# Altium PCB Version1.PcbDoc (part 1 of 2)
Units mm, origin at the board's own origin, x right, y up, seen from the top; angles counter-clockwise.
Board outline 82.53 x 37.85 mm, 2 copper layers (Top Layer, Bottom Layer); 105 components, 60 nets, 265 pads, 342 vias.
Unrouted connection lines stored in the file: 1.
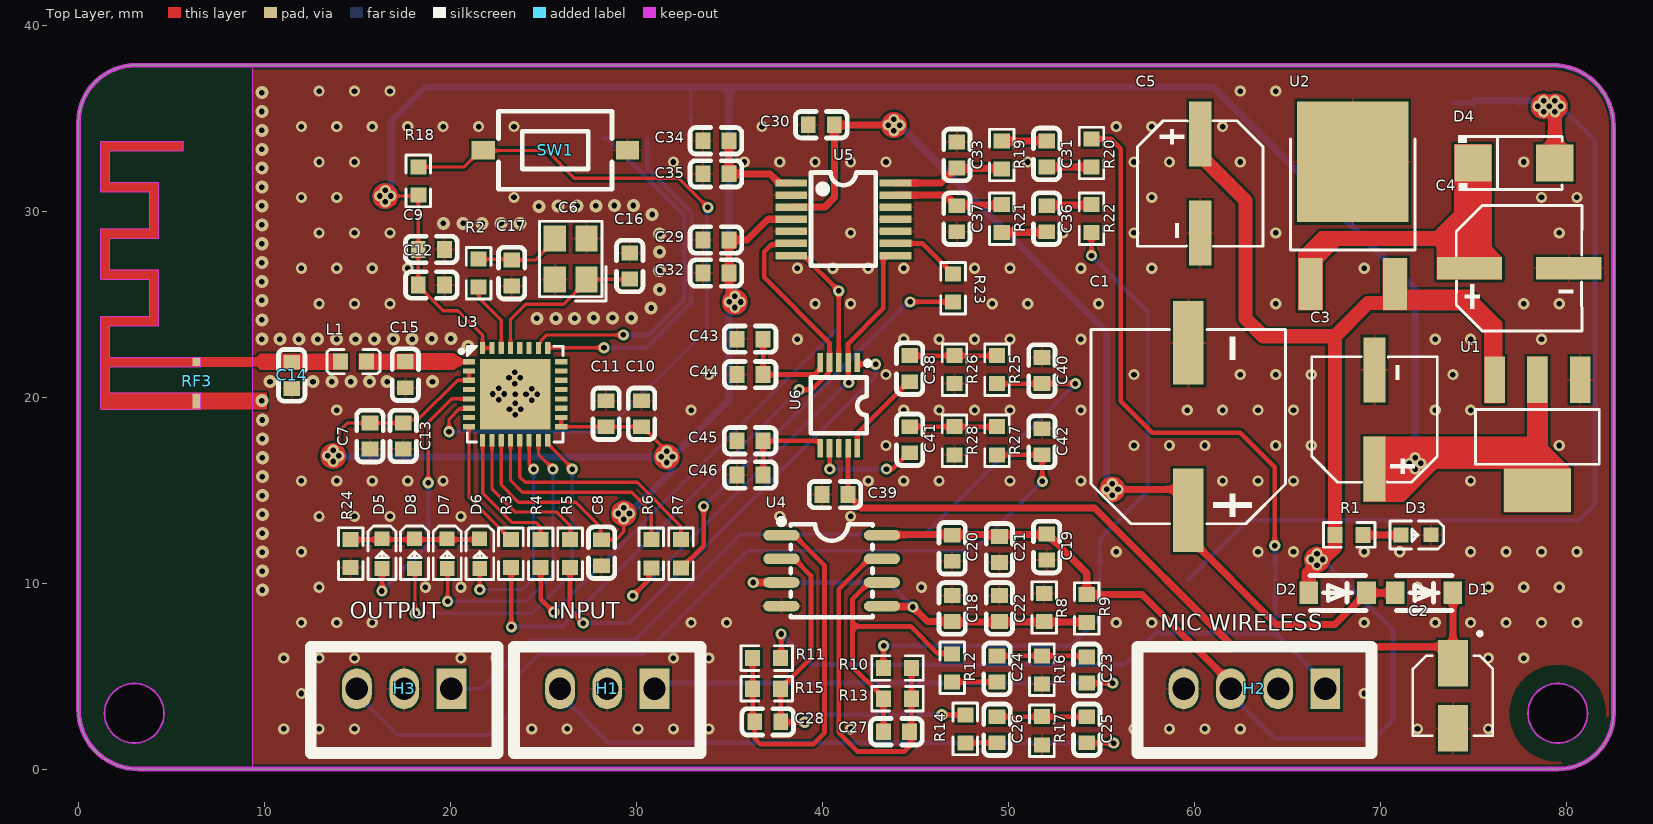
[diagram p0: Top Layer view]
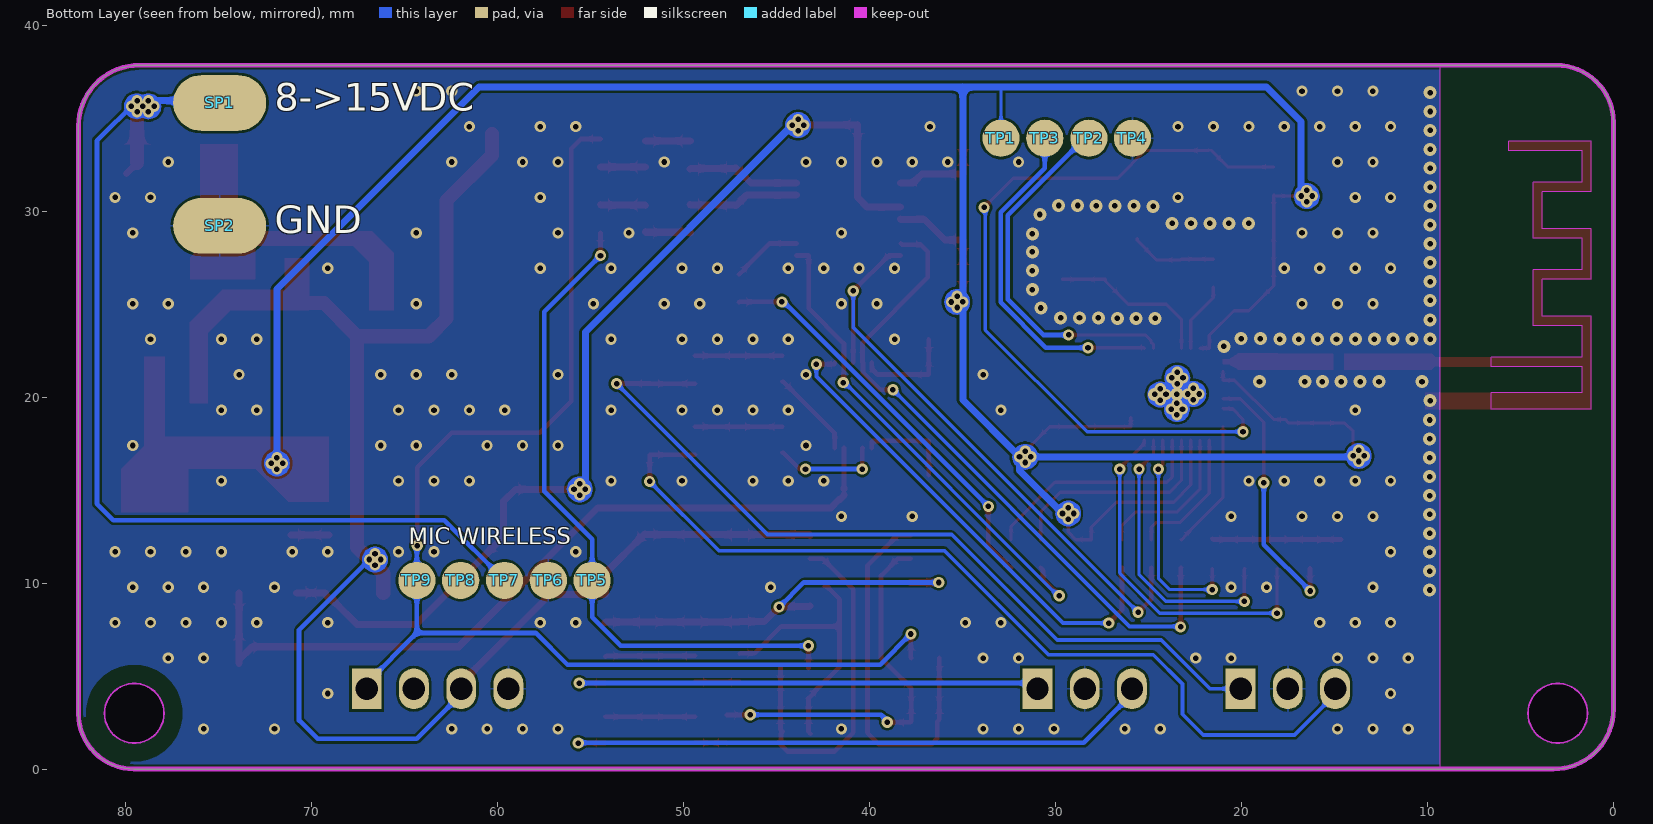
[diagram p1: Bottom Layer view, seen from below]
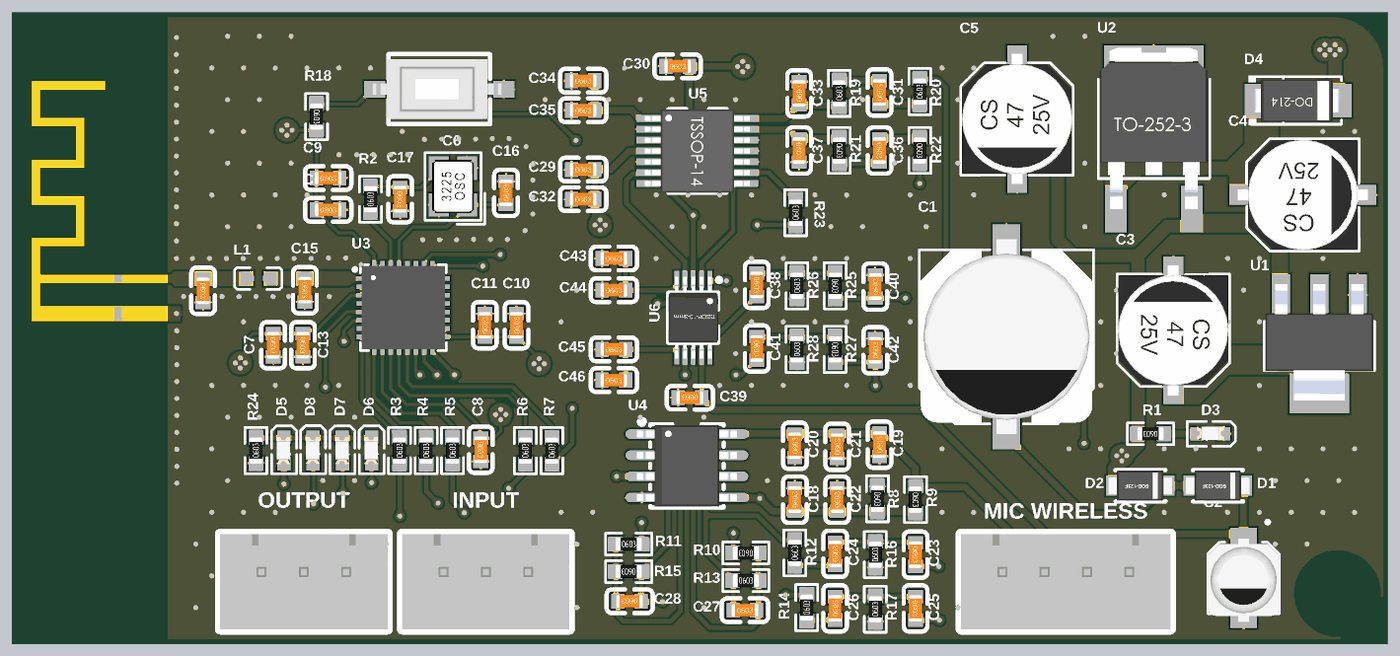
[diagram p2: 3D render of the assembled board from above, using the file's embedded part models]

## Layer stack, top to bottom
Top Solder: solder mask 0.0102, Solder Resist, Dk 3.5
Top Layer: signal copper 0.0356
Dielectric 1: dielectric 0.32, FR-4, Dk 4.8
Bottom Layer: signal copper 0.0356
Bottom Solder: solder mask 0.0102, Solder Resist, Dk 3.5

## Board outline
0,3.213 0,34.765 cw(c3.081,34.765) 3.081,37.846 3,37.846 79.174,37.846 79.262,37.846 cw(c79.262,34.574) 82.534,34.574 82.534,2.983 cw(c79.551,2.983) 79.551,0 3.213,0 cw(c3.213,3.213)
cut-out: 3,1.4 cw(c3,3) 1.4,3 cw(c3,3) 3,4.6 cw(c3,3) 4.6,3 cw(c3,3)
cut-out: 77.934,3 ccw(c79.534,3) 79.534,1.4 ccw(c79.534,3) 81.134,3 ccw(c79.534,3) 79.534,4.6 ccw(c79.534,3)

## Design rules (kind name [scope] priority, off if disabled: settings)
BoardOutlineClearance [All] p1: gap=0 ignorepadtopadclearanceinfootprint=FALSE
Clearance ANT_Clearance [InComponentClass('RF1')] p1: gap=0.127 ignorepadtopadclearanceinfootprint=FALSE except(0.25: Arc-Hole Track-Hole SMDPad-Hole THPad-Hole Via-Hole Fill-Hole Poly-Hole Region-Hole Text-Hole)
Clearance [All] p2: gap=0.127 ignorepadtopadclearanceinfootprint=FALSE except(0.25: Arc-Hole Track-Hole SMDPad-Hole THPad-Hole Via-Hole Fill-Hole Poly-Hole Region-Hole Text-Hole)
ComponentClearance [All] p1: gap=0.127 collisioncheckmode=3 verticalgap=0.127 showdistances=TRUE
DiffPairsRouting [All] p1: maxlimit=0.254 minlimit=0.127 mostfreqgap=0.127 toplayer_minwidth=0.127 toplayer_maxwidth=25.4 toplayer_prefwidth=0.127 bottomlayer_minwidth=0.127 bottomlayer_maxwidth=25.4 bottomlayer_prefwidth=0.127 maxuncoupledlength=12.7
Height [All] p1: minheight=0 maxheight=1816.048 prefheight=12.7
HoleSize [All] p1: absolutevalues=TRUE maxlimit=6.3 minlimit=0.3 maxpercent=80.000 minpercent=20.000
HoleToHoleClearance [All] p1: gap=0.025 allowstackedmicrovias=FALSE
MinimumAnnularRing [All] p1: minimumring=0.076
MinimumSolderMaskSliver [All] p1: minsoldermaskwidth=0
PlaneClearance [All] p1: clearance=0.127
PlaneConnect PlaneConnectPowerPads [InPadClass('PowerPads')] p1: planeconnectstyle=Direct reliefexpansion=0.508 reliefentries=4 reliefconductorwidth=0.254 reliefairgap=0.254
PlaneConnect [All] p2: pad.planeconnectstyle=Relief pad.reliefexpansion=0.3 pad.reliefentries=4 pad.reliefconductorwidth=0.127 pad.reliefairgap=0.127 via.planeconnectstyle=Direct via.reliefexpansion=0.3 via.reliefentries=4 via.reliefconductorwidth=0.127 via.reliefairgap=0.127
PolygonConnect PolygonConnectPowerPads [All vs (InPadClass('PowerPads'))] p1: connectstyle=Direct reliefconductorwidth=0.254 reliefentries=4 polygonreliefangle="90 Angle" airgapwidth=0.254
PolygonConnect [All] p2: thpad.connectstyle=Relief thpad.reliefconductorwidth=0.127 thpad.reliefentries=4 thpad.polygonreliefangle="90 Angle" thpad.airgapwidth=0.127 smdpad.connectstyle=Relief smdpad.reliefconductorwidth=0.127 smdpad.reliefentries=4 smdpad.polygonreliefangle="90 Angle" smdpad.airgapwidth=0.127 via.connectstyle=Direct via.reliefconductorwidth=0.127 via.reliefentries=4 via.polygonreliefangle="90 Angle" via.airgapwidth=0.127
RoutingVias [All] p1: holewidth=0.3 width=0.6 viastyle="Through Hole" minholewidth=0.3 minwidth=0.6 maxholewidth=0.6 maxwidth=6.6
SilkToSilkClearance [All] p1: silktosilkclearance=0
SilkToSolderMaskClearance [IsPad] p1: minsilkscreentomaskgap=0 clearancetoexposedcopper=TRUE
SolderMaskExpansion [All] p1: expansion=0.075 istentingtop=FALSE
Width [All] p1: maxlimit=25.4 minlimit=0.127 preferedwidth=0.127 minimp=50.000000 maximp=50.000000 favimp=50.000000
20 further rules are at their usual default settings.

## Classes and differential pairs
component class "Voltage Source": C1 C2 C3 C4 C5 D1 D2 D3 D4 R1 SP1 SP2 U1 U2
component class Peripheral: C18 C19 C20 C21 C22 C23 C24 C25 C26 C27 C28 C29 C30 C31 C32 C33 C34 C35 C36 C37 C38 C39 C40 C41 C42 C43 C44 C45 C46 D5 D6 D7 D8 H1 H2 H3 R8 R9 R10 R11 R12 R13 R14 R15 R16 R17 R18 R19 R20 R21 R22 R23 R24 R25 R26 R27 R28 SW1 TP5 TP6 TP7 TP8 TP9 U4 U5 U6
component class "Micro Controller": C6 C7 C8 C9 C10 C11 C12 C13 C14 C15 C16 C17 L1 R2 R3 R4 R5 R6 R7 TP1 TP2 TP3 TP4 U3
differential pair D: +D_P -D_N

## Components (designator, comment, footprint, x,y, rotation, side; value= is the part's Value field where it differs from the comment)
C1 "10x10.2" C_10x10.2mm_Aluminum_SMD 59.674,18.415 r90 top
C2 "10uF/16v" C_4.3x5_Aluminum_smd 73.898,3.937 r270 top
C3 "6.3x5.8" C_6.3x5.8mm_Aluminum_SMD 69.682,18.796 r90 top
C4 "6.3x5.8" C_6.3x5.8mm_Aluminum_SMD 77.457,26.924 r0 top
C5 "6.3x5.8" C_6.3x5.8mm_Aluminum_SMD 60.309,31.483 r270 top
C6 "XL2EL89CPI-111YLC-40M" XL2EL89CPI-111YLC-40M 26.465,27.428 r90 top
C7 "1uF" C0603 15.67,17.903 r270 top
C8 "1uF" C0603 28.127,11.633 r270 top
C9 "10uF" C0603 18.972,27.936 r0 top
C10 "10uF" C0603 30.275,19.105 r90 top
C11 "100nF" C0603 28.37,19.105 r90 top
C12 "100nF" C0603 18.972,26.031 r0 top
C13 "100nF" C0603 17.459,17.907 r270 top
C14 "10pF" C0603 11.465,21.172 r270 top
C15 "10pF" C0603 17.575,21.205 r270 top
C16 "10pF" C0603 29.64,27.047 r90 top
C17 "10pF" C0603 23.29,26.666 r270 top
C18 "10uF" C0603 46.974,8.636 r90 top
C19 "100nF" C0603 52.054,11.938 r90 top
C20 "10uF" C0603 46.974,11.873 r90 top
C21 "22uF" C0603 49.514,11.811 r90 top
C22 "100nF" C0603 49.514,8.636 r90 top
C23 "100nF" C0603 54.213,5.334 r270 top
C24 "10uF" C0603 49.387,5.387 r90 top
C25 "100nF" C0603 54.213,2.114 r270 top
C26 "10uF" C0603 49.387,2.114 r90 top
C27 "10nF" C0603 43.98,2.004 r0 top
C28 "10nF" C0603 37.058,2.54 r180 top
C29 "10uF" C0603 34.274,28.448 r0 top
C30 "10uF" C0603 39.938,34.646 r0 top
C31 "10uF" C0603 52.054,33.073 r90 top
C32 "100nF" C0603 34.274,26.67 r0 top
C33 "10nF" C0603 47.228,33.02 r90 top
C34 "100nF" C0603 34.274,33.782 r0 top
C35 "10uF" C0603 34.274,32.004 r0 top
C36 "10uF" C0603 52.054,29.591 r270 top
C37 "10nF" C0603 47.228,29.591 r270 top
C38 "10uF" C0603 44.688,21.528 r270 top
C39 "10uF" C0603 40.675,14.757 r180 top
C40 "33nF" C0603 51.8,21.421 r90 top
C41 "10uF" C0603 44.688,17.706 r270 top
C42 "33nF" C0603 51.8,17.6 r90 top
C43 "100nF" C0603 36.114,23.114 r0 top
C44 "10uF" C0603 36.114,21.209 r0 top
C45 "100nF" C0603 36.114,17.653 r0 top
C46 "10uF" C0603 36.114,15.811 r0 top
D1 "SOD4007" SOD4007 72.348,9.474 r180 top
D2 "SOD4007" SOD4007 67.701,9.474 r180 top
D3 "YELLOW" LED0603 71.911,12.592 r180 top
D4 "SS34" SS34 77.175,32.588 r0 top
D5 "RED" LED0603 16.316,11.582 r270 top
D6 "RED" LED0603 21.574,11.582 r270 top
D7 "RED" LED0603 19.821,11.582 r270 top
D8 "RED" LED0603 18.061,11.586 r270 top
H1 "Header 3P 2.54 Duc Thang" XH2.54M-3 30.972,4.318 r180 top
H2 "Header 4P 2.54 Duc Thang" XH2.54M-4 67.04,4.318 r180 top
H3 "Header 3P 2.54 Duc Thang" XH2.54M-3 20.05,4.318 r180 top
L1 "0603CT-3N0XGRW" 0603CT-3N0XGRW 14.781,21.905 r0 top
R1 "1kΩ" R0603 68.318,12.589 r180 top
R2 "10Ω" R0603 21.512,26.666 r90 top
R3 "10Ω" R0603 23.25,11.582 r90 top
R4 "10Ω" R0603 24.851,11.582 r90 top
R5 "10Ω" R0603 26.432,11.582 r90 top
R6 "10Ω" R0603 30.801,11.577 r90 top
R7 "10Ω" R0603 32.394,11.577 r90 top
R8 "5k1Ω" R0603 51.927,8.689 r270 top
R9 "5k1Ω" R0603 54.213,8.636 r270 top
R10 "1kΩ" R0603 44.033,5.433 r180 top
R11 "1kΩ" R0603 37.005,5.969 r0 top
R12 "1kΩ" R0603 46.974,5.441 r90 top
R13 "5k1Ω" R0603 44.033,3.782 r0 top
R14 "1kΩ" R0603 47.685,2.159 r90 top
R15 "5k1Ω" R0603 37.005,4.318 r180 top
R16 "10k" R0603 51.8,5.334 r90 top
R17 "10k" R0603 51.8,2.061 r90 top
R18 "1kΩ" R0603 18.272,31.623 r270 top
R19 "100Ω" R0603 49.641,33.02 r90 top
R20 "1kΩ" R0603 54.467,33.127 r90 top
R21 "100Ω" R0603 49.641,29.591 r270 top
R22 "1kΩ" R0603 54.467,29.591 r270 top
R23 "10Ω" R0603 47.025,25.857 r90 top
R24 "1kΩ" R0603 14.632,11.586 r90 top
R25 "470Ω" R0603 49.387,21.475 r270 top
R26 "10kΩ" R0603 47.101,21.475 r90 top
R27 "470Ω" R0603 49.387,17.653 r270 top
R28 "10kΩ" R0603 47.101,17.653 r90 top
RF3 "Antenna" 2.4GHZ-50OHMS_v1.1 6.59,19.796 r90 top (schematic designator RF1)
SP1 "SP" SP 74.939,35.814 r90 top
SP2 "SP" SP 74.939,29.21 r90 top
SW1 "GT-TC060A-H025-L1S" GT-TC060A-H025-L1S 25.638,33.274 r0 top
TP1 "TP" TP 32.935,33.919 r180 top
TP2 "TP" TP 28.205,33.919 r180 top
TP3 "TP" TP 30.579,33.919 r180 top
TP4 "TP" TP 25.868,33.919 r180 top
TP5 "TP" TP 54.917,10.146 r0 top
TP6 "TP" TP 57.273,10.146 r0 top
TP7 "TP" TP 59.628,10.146 r0 top
TP8 "TP" TP 61.984,10.146 r0 top
TP9 "TP" TP 64.339,10.146 r0 top
U1 "AMS1117-3.3" AMS1117-3.3 78.445,17.958 r90 top
U2 "MC7805BDTRKG" 7805 68.513,29.362 r90 top
U3 "''" ESP32-C3 23.479,20.155 r0 top
U4 "TL072CDR" TL072CDR 40.497,10.668 r270 top
U5 "PCM1808PWR" PCM1808PWR 41.126,29.561 r270 top
U6 "CS4344-CZZR" CS4344-CZZR 40.878,19.558 r180 top

## Footprints (in the part's own frame and the unit in brackets; to place one, negate y for a bottom-side part, rotate by r counter-clockwise, add the part's x,y. Pads: shape width x height; smd on the part's side, far side on the other; paste and mask are expansions set on the pad)
2.4GHZ-50OHMS_v1.1 [mm]
  rect 0.45x0.45 smd: 1(2.103,0.229)
  rect 0.8x0.45 smd: 2(0,0.229)
  Top Layer region: 13.947,0.963 13.447,0.963 13.447,4.903 11.747,4.903 11.747,2.263 8.747,2.263 8.747,4.903 7.047,4.903 7.047,2.263 4.047,2.263 4.047,4.903 2.347,4.903 2.347,0.003 1.847,0.003 1.847,4.903 0.447,4.903 0.447,0.003 -0.453,0.003 -0.453,5.403 4.547,5.403 4.547,2.763 6.547,2.763 6.547,5.403 9.247,5.403 9.247,2.763 11.247,2.763 11.247,5.403 13.947,5.403
  Keep-Out Layer lines w0.01: -0.453,5.403 4.547,5.403 4.547,2.763 6.547,2.763 6.547,5.403 9.247,5.403 9.247,2.763 11.247,2.763 11.247,5.403 13.947,5.403 13.947,0.963 13.447,0.963 13.447,4.903 11.747,4.903 11.747,2.263 8.747,2.263 8.747,4.903 7.047,4.903 7.047,2.263 4.047,2.263 4.047,4.903 2.347,4.903 2.347,0.003 1.847,0.003 1.847,4.903 0.447,4.903 0.447,0.003 -0.453,0.003 -0.453,5.403
0603CT-3N0XGRW [mm] "1.6A 3nH 39mO Wire-wound chip inductor ±2% 0603 Fixed Inductors RoHS"
  rect 0.8x0.864 smd paste-100 mask+0.051: 1(-0.7,0) 2(0.7,0)
  silkscreen extent -1.42,-0.65 1.42,0.65
7805 [mm]
  rect 2.8x1.3 smd paste+0 mask+0.051: 1(-3.292,2.273) 3(-3.292,-2.273)
  rect 6.5x6 smd paste+0 mask+0.051: 2(3.292,0)
  silkscreen extent -1.46,-3.35 4.51,3.34, body extent -3.33,-3.25 6.4,3.25, height 2.41
AMS1117-3.3 [mm]
  rect 2.5x1.1 smd paste+0 mask+0.051: 1(2.97,-2.3) 2(2.97,0) 3(2.97,2.3)
  rect 2.34x3.6 smd paste+0 mask+0.051: 4(-2.97,0)
  silkscreen extent -1.57,-3.33 1.37,3.33, body extent -3.37,-3.25 3.63,3.25, height 1.8
C0603 [mm]
  rect 0.8x0.9 smd: 1(-0.7,0) 2(0.7,0)
  silkscreen extent -1.39,-0.71 1.39,0.71, body extent -0.8,-0.4 0.8,0.4, height 0.4
C_4.3x5_Aluminum_smd [mm]
  rect 2.5x1.6 smd: 1(-1.75,0) 2(1.75,0)
  silkscreen extent -3.45,-2.15 2.15,2.15, body extent -2.37,-2.15 2.63,2.15, height 5.81
C_6.3x5.8mm_Aluminum_SMD [mm] "16V 10uF ±20% SMD,D6.3xL5.8mm Aluminum - Polymer Capacitors RoHS"
  rect 3.5x1.2 smd paste+0 mask+0.051: 1(-2.67,0) 2(2.67,0)
  silkscreen extent -3.38,-3.38 3.38,3.38, body extent -3.9,-3.3 3.9,3.3, height 5.51
C_10x10.2mm_Aluminum_SMD [mm] "1000uF 16V ±20% 347mA@120Hz SMD,D10xL10.2mm Aluminum Electrolytic Capacitors RoHS"
  rect 4.5x1.65 smd paste+0 mask+0.051: 1(-4.5,0) 2(4.5,0)
  silkscreen extent -5.23,-5.23 5.23,5.23, body extent -5.85,-5.15 5.85,5.15, height 10.52
CS4344-CZZR [mm]
  rect 0.3x1 smd paste+0 mask+0.051: 1(-1,-2.3) 2(-0.5,-2.3) 3(0,-2.3) 4(0.5,-2.3) 5(1,-2.3) 6(1,2.3) 7(0.5,2.3) 8(0,2.3) 9(-0.5,2.3) 10(-1,2.3)
  silkscreen extent -1.68,-2.39 1.5,1.5, body extent -1.5,-2.45 1.5,2.45, height 1.11
ESP32-C3 [mm] "Others 160MHz QFN-32-EP(5x5) RF Transceiver Modules and Modems RoHS"
  rect 0.65x0.28 smd paste-100 mask+0.051: 1(-2.478,1.75) 2(-2.478,1.25) 3(-2.478,0.75) 4(-2.478,0.25) 5(-2.478,-0.25) 6(-2.478,-0.75) 7(-2.478,-1.25) 8(-2.478,-1.75) 17(2.478,-1.75) 18(2.478,-1.25) 19(2.478,-0.75) 20(2.478,-0.25) 21(2.478,0.25) 22(2.478,0.75) 23(2.478,1.25) 24(2.478,1.75)
  rect 0.28x0.65 smd paste-100 mask+0.051: 9(-1.75,-2.478) 10(-1.25,-2.478) 11(-0.75,-2.478) 12(-0.25,-2.478) 13(0.25,-2.478) 14(0.75,-2.478) 15(1.25,-2.478) 16(1.75,-2.478) 25(1.75,2.478) 26(1.25,2.478) 27(0.75,2.478) 28(0.25,2.478) 29(-0.25,2.478) 30(-0.75,2.478) 31(-1.25,2.478) 32(-1.75,2.478)
  rect 3.8x3.8 smd paste-100 mask+0.051: 33(0,0)
  silkscreen extent -3,-2.58 2.58,2.58, body extent -2.5,-2.5 2.5,2.5, height 0.9
GT-TC060A-H025-L1S [mm] "Tactile Switch SPST 160gf 2.5mm SMD (SMT) Tab 6.05mm x 3.5mm Surface Mount"
  rect 1.25x1 smd paste+0 mask+0.051: 1(-3.875,0) 2(3.875,0)
  silkscreen extent -3.05,-2.1 3.05,2.1, body extent -4.01,-1.79 3.76,1.79, height 2.54
LED0603 [mm]
  rect 0.8x0.8 smd paste+0 mask+0.051: 1(-0.799,-0.004) 2(0.799,0.004)
  silkscreen extent -1.49,-0.75 1.39,0.76, body extent -0.8,-0.42 0.8,0.38, height 0.7
PCM1808PWR [mm]
  rect 0.4x1.7 smd paste+0 mask+0.051: 1(-1.95,-2.8) 2(-1.3,-2.8) 3(-0.65,-2.8) 4(0,-2.8) 5(0.65,-2.8) 6(1.3,-2.8) 7(1.95,-2.8) 8(1.95,2.8) 9(1.3,2.8) 10(0.65,2.8) 11(0,2.8) 12(-0.65,2.8) 13(-1.3,2.8) 14(-1.95,2.8)
  silkscreen extent -2.51,-1.74 2.5,1.74, body extent -2.5,-3.15 2.5,3.15, height 1.01
R0603 [mm]
  rect 0.806x0.864 smd paste-100 mask+0.051: 1(-0.753,0) 2(0.753,0)
  silkscreen extent -1.39,-0.66 1.39,0.66, body extent -0.8,-0.4 0.8,0.4, height 0.45
SOD4007 [mm]
  rect 1x1.2 smd paste+0 mask+0.051: 1(-1.55,0) 2(1.55,0)
  silkscreen extent -1.52,-0.93 1.49,0.95, body extent -1.9,-0.9 1.9,0.9, height 1.02
SP [mm]
  oval 3x5 smd far side paste+0 mask+0.051: 1(0,0)
SS34 [mm]
  rect 2x2 smd paste+0 mask+0.051: 1(-2.2,0) 2(2.2,0)
  silkscreen extent -2.98,-1.5 2.6,1.5, body extent -2.65,-1.29 2.49,1.27, height 2.63
TL072CDR [mil]
  oval 22.38x76.78 smd paste+0 mask+2: 1(-75,-106.5) 2(-25,-106.5) 3(25,-106.5) 4(75,-106.5) 5(75,106.5) 6(25,106.5) 7(-25,106.5) 8(-75,106.5)
  silkscreen extent -110,-112 98,87, body extent -96,-118 96,118, height 69
TP [mm]
  round 2 smd far side paste+0 mask+0.051: 1(0,0)
XH2.54M-3 [mm]
  rect 1.6x2.2 hole 1.2: 1(0,0)
  oval 1.6x2.2 hole 1.2: 2(2.54,0) 3(5.08,0)
  silkscreen extent -2.48,-2.26 7.56,3.46, body extent -2.48,-2.26 7.56,3.48, height 6.91
XH2.54M-4 [mm]
  rect 1.6x2.2 hole 1.2: 1(0,0)
  oval 1.6x2.2 hole 1.2: 2(2.54,0) 3(5.08,0) 4(7.62,0)
  silkscreen extent -2.48,-2.26 10.1,3.46, body extent -2.48,-2.26 10.1,3.48, height 6.91
XL2EL89CPI-111YLC-40M [mm] "CRYSTAL 40MHz 15pF SMD"
  rect 1.4x1.2 smd paste+0 mask+0.051: 1(-1.1,-0.85) 2(1.1,-0.85) 3(1.1,0.85) 4(-1.1,0.85)
  silkscreen extent -2.26,-1.91 2.03,1.68, body extent -1.6,-1.25 1.6,1.25, height 0.68

## Part data
C1: library part C_10x10.2_Aluminum_SMD, "1000uF 16V ±20% 347mA@120Hz SMD,D10xL10.2mm Aluminum Electrolytic Capacitors RoHS", LCSC Part #=C72470, Manufacturer=ROQANG, Mfr. Part #=RVT1C102M1010, Link=https://www.lcsc.com/product-detail/C72470.html
C2: library part C_4.3x5_Aluminum_SMD, "10ÂµF 16V Aluminum Electrolytic Capacitors Radial, Can - SMD 2000 Hrs @ 105Â°C", Package="RADIAL-2 Panasonic", Availability="In Stock", Check_prices=https://www.snapeda.com/parts/EEE-HB1C100R/Panasonic%20Electronic%20Components/view-part/605830/?ref=eda, MF="Panasonic Electronic", MP=EEE-HB1C100R, Price=None, Purchase-URL=https://pricing.snapeda.com/search/part/EEE-HB1C100R/?ref=eda, SnapEDA_Link=https://www.snapeda.com/parts/EEE-HB1C100R/Panasonic%20Electronic%20Components/view-part/605830/?ref=snap
C3 C4 C5: library part C_6.3x5.8_Aluminum_SMD, "16V 10uF ±20% SMD,D6.3xL5.8mm Aluminum - Polymer Capacitors RoHS", LCSC Part #=C5246522, Manufacturer="Honor Elec", Mfr. Part #=HV1C106M0605PZ, Link=https://www.lcsc.com/product-detail/C5246522.html
C6: "Crystal Oscillator 15pF SMD3225-4P Crystals RoHS", LCSC Part #=C5444549, Manufacturer="YXC Crystal Oscillators", Package=SMD3225-4P, Key Attributes="Crystal Oscillator 15pF SMD3225-4P Crystals RoHS", Link=https://www.lcsc.com/product-detail/C5444549.html?s_z=n_oscillator, Mfr. Part #=XL2EL89CPI-111YLC-40M
C7 C8: library part C0603_1uF_±1%, "50V 10pF NP0 ±1% 0402 Multilayer Ceramic Capacitors MLCC - SMD/SMT ROHS", LCSC Part #=C513681, Manufacturer=YAGEO, Mfr. Part #=CC0402FRNPO9BN100, Package=0603, Tolerance=±1%, Voltage Rating=50V, Capacitance=1uF, Link=https://www.lcsc.com/product-detail/C513681.html?s_z=n_capital%2520yageo%252010pF%25200402
C9 C10 C38 C39 C41: library part C0603_10uF_±1%, "50V 10pF NP0 ±1% 0402 Multilayer Ceramic Capacitors MLCC - SMD/SMT ROHS", LCSC Part #=C513681, Manufacturer=YAGEO, Mfr. Part #=CC0402FRNPO9BN100, Package=0603, Tolerance=±1%, Voltage Rating=50V, Capacitance=10uF, Link=https://www.lcsc.com/product-detail/C513681.html?s_z=n_capital%2520yageo%252010pF%25200402
C11 C12 C13: library part C0603_100nF_±1%, "50V 10pF NP0 ±1% 0402 Multilayer Ceramic Capacitors MLCC - SMD/SMT ROHS", LCSC Part #=C513681, Manufacturer=YAGEO, Mfr. Part #=CC0402FRNPO9BN100, Package=0603, Tolerance=±1%, Voltage Rating=50V, Capacitance=100nF, Link=https://www.lcsc.com/product-detail/C513681.html?s_z=n_capital%2520yageo%252010pF%25200402
C14 C15 C16 C17: library part C0603_10pF_±1%, "50V 10pF NP0 ±1% 0402 Multilayer Ceramic Capacitors MLCC - SMD/SMT ROHS", LCSC Part #=C513681, Manufacturer=YAGEO, Mfr. Part #=CC0402FRNPO9BN100, Package=0603, Tolerance=±1%, Voltage Rating=50V, Capacitance=10pF, Link=https://www.lcsc.com/product-detail/C513681.html?s_z=n_capital%2520yageo%252010pF%25200402
C18 C20 C24 C26 C29 C30 C31 C35 C36 C44 C46: library part C0603_10uF_±10%_X7R, "25V 10uF X5R ±20% 0603 Multilayer Ceramic Capacitors MLCC - SMD/SMT ROHS", LCSC Part #=C596327, Manufacturer=YAGEO, Mfr. Part #=CC0603MRX5R8BB106, Package=0603, Temperature Coefficient=X5R, Tolerance=±20%, Capacitance=10uF, Link=https://www.lcsc.com/product-detail/C596327.html?s_z=n_capital%25200603%252010uF%2520yageo
C19 C22 C23 C25 C32 C34 C43 C45: library part C0603_100nF_±10%_X7R, "50V 100nF X7R ±10% 0603 Multilayer Ceramic Capacitors MLCC - SMD/SMT ROHS", LCSC Part #=C14663, Manufacturer=YAGEO, Mfr. Part #=CC0603KRX7R9BB104, Package=0603, Temperature Coefficient=X7R, Tolerance=±10%, Capacitance=100nF, Link=https://www.lcsc.com/product-detail/C14663.html?s_z=n_capital%25200603%2520100nf
C21: library part C0603_22uF_±20%_X5R, "6.3V 22uF X5R ±20% 0603 Multilayer Ceramic Capacitors MLCC - SMD/SMT ROHS", LCSC Part #=C109448, Manufacturer=YAGEO, Mfr. Part #=CC0603MRX5R5BB226, Package=0603, Temperature Coefficient=X5R, Tolerance=±20%, Capacitance=22uF, ComponentLink1Description="New link", Link=https://www.lcsc.com/product-detail/C109448.html?s_z=n_capital%25200603%252022uf%2520yageo
C27 C28 C33 C37: library part C0603_10nF_±1%, "50V 10pF NP0 ±1% 0402 Multilayer Ceramic Capacitors MLCC - SMD/SMT ROHS", LCSC Part #=C513681, Manufacturer=YAGEO, Mfr. Part #=CC0402FRNPO9BN100, Package=0603, Tolerance=±1%, Voltage Rating=50V, Capacitance=10nF, Link=https://www.lcsc.com/product-detail/C513681.html?s_z=n_capital%2520yageo%252010pF%25200402
C40 C42: library part C0603_33nF_±10%, "100mW Thick Film Resistor 75V ±100ppm/℃ ±1% 470Ω 0603 Chip Resistor - Surface Mount ROHS", LCSC Part #=C106856, Manufacturer=YAGEO, Mfr. Part #=CC0603KRX7R9BB333, Package=0603, Temperature Coefficient=X7R, Tolerance=±10%, Voltage Rating=50V, Capacitance=33nF, Link=https://www.lcsc.com/product-detail/C106856.html?s_z=n_capital%2520yageo%25200603%252033nF
D1 D2: "1A Independent 1kV 1.1V@1A SOD-123FL Diodes - General Purpose ROHS", Current - Rectified=1A, LCSC Part #=C18124, Manufacturer="MDD(Microdiode Semiconductor)", Package=SOD-123FL, Voltage - DC Reverse(Vr)=1kV, Link=https://www.lcsc.com/product-detail/C18124.html?s_z=n_SOD4007, Mfr. Part #=SOD4007
D3: library part D0603_YELLOW, "25mcd~40mcd Water Clear -40℃~+85℃ 624nm Red 120° 60mW 0402 LED Indication - Discrete ROHS", LCSC Part #=C965793, Manufacturer=XINGLIGHT, Mfr. Part #=XL-1005UGC, Package=0603, Power(Watts)=60mW, Voltage - Forward(Vf)=3V, Illumination Color=YELLOW, Link=https://www.lcsc.com/product-detail/C136765.html?s_z=n_LED%25200402%2520RED
D4: "40V Independent 3A 550mV@3A SMA(DO-214AC) Schottky Diodes ROHS", Current - Rectified=3A, LCSC Part #=C8678, Manufacturer="MDD(Microdiode Semiconductor)", Package=SMA(DO-214AC), Voltage - DC Reverse(Vr)=40V, Link=https://www.lcsc.com/product-detail/C8678.html?s_z=n_SS34, Mfr. Part #=SS34
D5 D6 D7 D8: library part D0603_RED, "25mcd~40mcd Water Clear -40℃~+85℃ 624nm Red 120° 60mW 0402 LED Indication - Discrete ROHS", LCSC Part #=C965793, Manufacturer=XINGLIGHT, Mfr. Part #=XL-1005UGC, Package=0603, Power(Watts)=60mW, Voltage - Forward(Vf)=3V, Illumination Color=RED, Link=https://www.lcsc.com/product-detail/C136765.html?s_z=n_LED%25200402%2520RED
H1 H2 H3: "Cắm", Chung_Loai=Cắm, Don_Vi=Con
  H1 H3: Ma_Hang=MH001292, Ten_Linh_Kien="Header 3P XH2.54-3P Đực Thẳng"
  H2: Ma_Hang=MH001285, Ten_Linh_Kien="Header 4P XH2.54-4P Đực Thẳng"
L1: library part L_3nH_3.6A_0603, "1.6A 3nH 39mΩ Wire-wound chip inductor ±2% 0603 Fixed Inductors RoHS", LCSC Part #=C41050064, Manufacturer=Coilcraft, Package=0603, Key Attributes="1.6A 3nH 39mΩ Wire-wound chip inductor ±2% 0603 Fixed Inductors RoHS", Link=https://www.lcsc.com/product-detail/C41050064.html?s_z=n_inductor%25203nH%25200603, Mfr. Part #=0603CT-3N0XGRW
R1 R10 R11 R12 R14 R18 R20 R22 R24: library part R0603_1kΩ_±1%, "62.5mW Thick Film Resistor 50V ±1% ±200ppm/℃ 10Ω 0402 Chip Resistor - Surface Mount ROHS", LCSC Part #=C138066, Manufacturer=YAGEO, Mfr. Part #=RC0402FR-0710RL, Package=0603, Tolerance=±1%, Link=https://www.lcsc.com/product-detail/C138066.html?s_z=n_resistor%25200402%252010R, Resistance=1kΩ
R2 R3 R4 R5 R6 R7 R23: library part R0603_10Ω_±1%, "62.5mW Thick Film Resistor 50V ±1% ±200ppm/℃ 10Ω 0402 Chip Resistor - Surface Mount ROHS", LCSC Part #=C138066, Manufacturer=YAGEO, Mfr. Part #=RC0402FR-0710RL, Package=0603, Tolerance=±1%, Link=https://www.lcsc.com/product-detail/C138066.html?s_z=n_resistor%25200402%252010R, Resistance=10Ω
R8 R9 R13 R15: library part R0603_5k1Ω_±1%, "100mW Thick Film Resistor 75V ±100ppm/℃ ±1% 5.1kΩ 0603 Chip Resistor - Surface Mount ROHS", LCSC Part #=C2907044, Manufacturer=FOJAN, Mfr. Part #=FRC0603F5101TS, Package=0603, Tolerance=±1%, Key Attributes="RES 5.1kΩ ±1% 100mW 0603", Link=https://www.lcsc.com/product-detail/C2907044.html?s_z=n_5k1%25200603, Resistance=5k1Ω
R16 R17: library part R0603_1kΩ_±1%, "62.5mW Thick Film Resistor 50V ±1% ±200ppm/℃ 10Ω 0402 Chip Resistor - Surface Mount ROHS", LCSC Part #=C138066, Manufacturer=YAGEO, Mfr. Part #=RC0402FR-0710RL, Package=0603, Resistance=1kΩ, Tolerance=±1%, Link=https://www.lcsc.com/product-detail/C138066.html?s_z=n_resistor%25200402%252010R
R19 R21: library part R0603_100Ω_±1%, "62.5mW Thick Film Resistor 50V ±1% ±200ppm/℃ 10Ω 0402 Chip Resistor - Surface Mount ROHS", LCSC Part #=C138066, Manufacturer=YAGEO, Mfr. Part #=RC0402FR-0710RL, Package=0603, Tolerance=±1%, Link=https://www.lcsc.com/product-detail/C138066.html?s_z=n_resistor%25200402%252010R, Resistance=100Ω
R25 R27: library part R0603_470Ω_±1%_1, "62.5mW Thick Film Resistor 50V ±1% ±200ppm/℃ 10Ω 0402 Chip Resistor - Surface Mount ROHS", LCSC Part #=C114669, Manufacturer=YAGEO, Mfr. Part #=RC0603FR-07470RL, Package=0603, Tolerance=±1%, Key Attributes="RES 470Ω ±1% 100mW 0603", Link=https://www.lcsc.com/product-detail/C114669.html?s_z=n_resistor%2520470%25CE%25A9%25200603%2520yageo, Resistance=470Ω
R26 R28: library part R0603_10kΩ_±1%, "62.5mW Thick Film Resistor 50V ±1% ±200ppm/℃ 10Ω 0402 Chip Resistor - Surface Mount ROHS", LCSC Part #=C138066, Manufacturer=YAGEO, Mfr. Part #=RC0402FR-0710RL, Package=0603, Tolerance=±1%, Link=https://www.lcsc.com/product-detail/C138066.html?s_z=n_resistor%25200402%252010R, Resistance=10kΩ
SW1: "Tactile Switch SPST 160gf 2.5mm SMD (SMT) Tab 6.05mm x 3.5mm Surface Mount", LCSC Part #=C7450623, Manufacturer=G-Switch, Package=SMD,6x3mm, Key Attributes="SWITCH TACTILE SPST 160gf SMD", Link=https://www.lcsc.com/product-detail/C7450623.html?s_z=n_button, Mfr. Part #=GT-TC060A-H025-L1S
U1: "72dB@(120Hz) 1A Fixed 3.3V Positive 16V SOT-223 Voltage Regulators - Linear, Low Drop Out (LDO) Regulators ROHS", LCSC Part #=C6186, Manufacturer="Advanced Monolithic Systems", Output Current=1A, Package=SOT-223, Link=https://www.lcsc.com/product-detail/C6186.html?s_z=n_ams1117-3.3, Mfr. Part #=AMS1117-3.3
U2: library part 7805, "68dB@(120Hz) 1A Fixed 5V Positive 24V TO-252-2(DPAK) Voltage Regulators - Linear, Low Drop Out (LDO) Regulators ROHS", LCSC Part #=C110908, Manufacturer=onsemi, Output Current=1A, Output Voltage=5V, Package=TO-252-2(DPAK), Voltage - Supply=24V, Link=https://www.lcsc.com/product-detail/C110908.html?s_z=n_7805, Mfr. Part #=MC7805BDTRKG
U3: library part ESP32-C3, "Others 160MHz QFN-32-EP(5x5) RF Transceiver Modules and Modems RoHS", LCSC Part #=C2838500, Manufacturer=ESPRESSIF, Package=QFN-32-EP(5x5), Link=https://www.lcsc.com/product-detail/C2838500.html?s_z=n_ESP32%2520C3
U4: "3mV 65pA 3MHz 13V/us 2 SOIC-8 FET Input Amplifiers ROHS", LCSC Part #=C67473, Manufacturer=TI, Package=SOIC-8, Dual Supply=-15V~15V, Gain Bandwidth Product=3MHz, Link=https://www.lcsc.com/product-detail/C67473.html?s_z=n_TL072CDR, Mfr. Part #=TL072CDR, Noise density(eN)=18nV/√Hz@1kHz, Number of Channels=2
U5: "4.5V~5.5V 24 I2S TSSOP-14 ADCs/DACs - Special Purpose ROHS", LCSC Part #=C55513, Manufacturer=TI, Package=TSSOP-14, Voltage - Supply=4.5V~5.5V, Interface=I2S, Key Attributes="Single-ended analog input 24-bit 96kHz stereo A/D converter", Link=https://www.lcsc.com/product-detail/C55513.html?s_z=n_pcm1808, Mfr. Part #=PCM1808PWR, Number of Channels=2
U6: "250ms I2S 3.3V~5V 24 TSSOP-10-3mm Digital to Analog Converters (DAC) ROHS", LCSC Part #=C8952, Manufacturer="Cirrus Logic", Package=TSSOP-10-3mm, Voltage - Supply=3.3V~5V, Interface=I2S, Key Attributes="10-Pin, 24-Bit, 192 kHz Stereo D/A Converter", Link=https://www.lcsc.com/product-detail/C8952.html?s_z=n_cs4344, Mfr. Part #=CS4344-CZZR, Number of Channels=2

## Via types
v1: diameter 0.6, hole 0.3, Top Layer to Bottom Layer, tented both sides, 274 vias
v2: diameter 0.7, hole 0.3, Top Layer to Bottom Layer, tented both sides, 68 vias

## Nets (pads, with @x,y where several pads share a name; then routed paths per layer and width w, separated by ;. In a path a pad name is that pad's centre, name@x,y a point inside that pad or via, vN(x,y) a via of type N, cw(c..) or ccw(c..) an arc to the next point about the centre after c; other vN are vias at no path point)
+3.3V: C3.1 C7.1 C8.1 C9.1 C10.1 C11.1 C12.1 C13.1 C29.2 C32.2 R18.2 TP1.1 U1.2 U1.4 U3.2 U3.3 U3.11 U3.17 U3.18 U3.31 U3.32 U5.4 | length 168.3
  Top Layer w0.178: v1(14.005,16.84) 14.005,18.161 14.447,18.603 C7.1 17.459,18.603 17.655,18.799 18.275,18.799 20.381,20.905 U3.3 U3.2 ; v1(16.799,30.81) 18.213,30.81 R18.2 18.272,27.937 C12.1 18.271,25.981 19.615,24.638 20.406,24.638 21.729,23.315 U3.32 U3.31 ; U3.11 22.729,15.279 23.657,14.351 26.73,14.351 28.077,13.004 28.077,12.333 28.903,12.333 29.321,12.751 v1(29.321,13.437) ; U3.18 U3.17 C11.1 30.325,18.405 31.937,16.792 v1(31.937,16.789)
  Top Layer w0.381: v1(34.985,25.121) 34.98,25.126 34.98,26.664 C32.2 C29.2 35.946,28.448 37.049,29.551 38.316,29.551 U5.4 ; v1@35.588,25.127 v1(35.601,25.114)
  Bottom Layer w0.178: 29.061,36.629 29.11,36.678 ; TP1.1 32.935,36.616 32.996,36.678
  Bottom Layer w0.381: v1(14.005,16.84) 14.056,16.789 v1(31.937,16.789) ; v1(16.799,30.81) 16.799,34.823 18.653,36.678 29.11,36.678 32.996,36.678 34.985,36.678 ; v1(29.321,13.437) 31.937,16.053 v1(31.937,16.789) ; v1(71.866,16.129) v1(71.866,16.739) 71.866,25.806 60.995,36.678 34.985,36.678 ; v1(31.937,16.789) 34.985,19.837 v1(34.985,25.121) 34.985,36.678
  other v1: 29.016,13.741 29.626,13.741 29.321,14.046 71.561,16.434 72.171,16.434 31.632,16.485 13.7,16.535 31.328,16.789 13.395,16.84 31.632,17.094 13.7,17.145 35.29,24.816 35.29,25.425 16.494,30.505 16.189,30.81 16.494,31.115
+3.7: C2.1 C39.1 D1.1 U6.9 | length 42.2
  Top Layer w0.254: C39.1@41.378,15.116 U6.9
  Top Layer w0.381: C39.1 41.375,14.707 41.584,14.498 41.634,14.498 42.086,14.046 54.619,14.046 62.088,6.578 73.187,6.578 C2.1@73.898,5.867 ; C39.1@41.375,15.063 C39.1@41.375,15.113 ; C2.1 C2.1@73.898,5.867 ; D1.1 C2.1@73.898,5.867
+4.3: C1.1 C30.2 D1.2 D2.1 U5.3 | length 54.6
  Top Layer w0.381: U5.3 40.126,30.211 40.638,30.723 C30.2 40.651,34.633 44.142,34.633 v1(44.155,34.62) ; v1(55.28,15.037) 59.039,15.037 59.674,14.402 C1.1 59.674,12.49 64.392,7.772 67.549,7.772 68.841,9.065 68.941,9.065 69.251,9.374 D2.1 D1.2
  Bottom Layer w0.381: v1(44.155,34.62) 55.28,23.495 v1(55.28,15.037)
  other v1: 55.585,14.732 55.889,15.037 55.585,15.342 43.843,34.322 43.539,34.627 43.843,34.931
+5V: C5.1 C19.2 C20.2 C21.2 D2.2 H2.3 R1.2 R9.1 U1.3 U2.3 U4.8 | length 79.1
  Top Layer w0.381: U4.8 43.235,12.606 52.021,12.606 C19.2 52.104,12.638 54.213,10.529 R9.1 57.189,9.389 61.96,4.618 H2.3
  Top Layer w0.762: C5.1 60.309,33.003 62.747,30.565 62.747,24.232 63.704,23.275 67.557,23.275 ; D2.2 66.151,10.532 67.315,11.696 67.344,11.696 67.557,11.909 67.557,23.275 ; U2.3 70.786,25.32 70.517,25.051 69.333,25.051 67.557,23.275
  Bottom Layer w0.254: H2.3 61.96,4.018 64.352,1.626 69.682,1.626 70.672,2.616 70.672,7.484 v1@66.891,11.264
  other v1: 66.591,10.964 66.286,11.269 66.895,11.269 66.591,11.573
+8VDC: D4.2 SP1.1 TP7.1 | length 56.8
  Top Layer w0.381: D4.2@79.384,32.598 D4.2 D4.2@79.943,32.02
  Top Layer w0.762: D4.2@79.384,32.598 v1(79.384,35.941) ; v1(79.384,35.331) v1(79.384,35.941) ; 79.384,35.636 v1(79.384,35.941)
  Bottom Layer w0.254: TP7.1 62.868,13.386 80.654,13.386 81.543,14.275 81.543,33.782 v1(79.384,35.941) ; SP1.1@73.939,35.814 SP1.1
  Bottom Layer w0.381: SP1.1 75.066,35.941 v1(79.384,35.941)
  other v1: 78.775,35.331 78.47,35.636 79.08,35.636 79.689,35.636 78.775,35.941
AOUTL-C2: C42.1 H3.3 R27.2 | length 48.5
  Top Layer w0.254: R27.2 C42.1 51.825,16.874 v1(51.825,15.469)
  Bottom Layer w0.203: H3.3 14.97,4.018 17.159,1.829 22.057,1.829 23.174,2.946 23.174,4.572 24.749,6.147 30.388,6.147 35.976,11.735 48.092,11.735 v1(51.825,15.469)
AOUTR-C2: C40.1 H3.1 R25.2 | length 44.6
  Top Layer w0.254: R25.2 C40.1 51.805,20.726 v1(53.603,20.726)
  Bottom Layer w0.203: H3.1 21.701,4.318 24.317,6.934 29.905,6.934 35.58,12.609 45.486,12.609 v1(53.603,20.726)
BCK: R6.1 U5.8 U6.2 | length 26.6
  Top Layer w0.254: v1(29.804,9.322) 30.67,10.188 30.67,10.693 R6.1 ; v1(41.411,20.777) 41.395,20.794 41.395,21.841 U6.2 41.378,22.877 43.266,24.766 43.266,27.602 43.276,27.611 U5.8
  Bottom Layer w0.203: v1(29.804,9.322) 29.88,9.322 41.335,20.777 v1(41.411,20.777)
BUTTON: R18.1 SW1.1 U3.6 | length 41.8
  Top Layer w0.178: R18.1 20.74,32.376 SW1.1@21.638,33.274 ; v1(19.923,18.138) 19.923,18.821 20.47,19.368 20.964,19.368 U3.6 ; SW1.1@21.771,33.266 21.777,33.26 25.168,33.26 26.657,31.771 32.272,31.771 v1(33.842,30.201)
  Bottom Layer w0.178: v1(19.923,18.138) 28.307,18.138 33.773,23.604 33.773,30.132 v1(33.842,30.201)
D_N: TP3.1 U3.25 | length 18.6
  Top Layer w0.178: U3.25 25.253,22.657 v1(28.254,22.657)
  Bottom Layer w0.254: v1(28.254,22.657) 30.515,22.657 32.953,25.095 32.953,29.927 30.579,32.301 TP3.1
D_P: TP2.1 U3.26 | length 19.7
  Top Layer w0.178: U3.26 24.729,22.818 24.873,22.962 24.873,23.047 25.169,23.343 v1(29.296,23.343)
  Bottom Layer w0.254: TP2.1 28.422,33.919 32.572,29.769 32.572,25.253 30.662,23.343 30.231,23.343 v1(29.296,23.343)
DIN: R5.1 U6.1 | length 26.2
  Top Layer w0.254: R5.1 26.432,8.553 v1(27.137,7.849) ; U6.1 41.878,21.791 41.901,21.768 v1(42.859,21.768)
  Bottom Layer w0.203: v1(27.137,7.849) 29.6,7.849 42.859,21.107 v1(42.859,21.768)
DOUT: R7.1 R23.1 | length 21.8
  Top Layer w0.254: R7.1 32.423,10.824 33.614,12.014 v1(33.614,14.122) ; v1(44.713,25.121) 47.008,25.121 R23.1
  Bottom Layer w0.254: v1(33.614,14.122) 44.546,25.054 44.647,25.054 v1(44.713,25.121)
GND: C1.2 C2.2 C3.2 C4.2 C5.2 C6.2 C6.4 C7.2 C8.2 C9.2 C10.2 C11.2 C12.2 C13.2 C14.2 C15.2 C16.2 C17.2 C18.2 C19.1 C20.1 C21.1 C22.2 C29.1 C30.1 C32.1 C33.2 C34.1 C35.1 C37.2 C39.2 C40.2 C42.2 C43.1 C44.1 C45.1 C46.1 D3.1 H1.2 H2.4 H3.2 R8.1 R16.1 R17.1 R24.1 R26.1 R28.1 SP2.1 SW1.2 TP4.1 TP6.1 U1.1 U2.2 U3.33 U4.4 U5.2 U5.5 U5.10 U5.11 U5.12 U6.8
  other v1: 11.033,2.159 12.938,2.159 14.843,2.159 24.368,2.159 26.273,2.159 30.083,2.159 31.988,2.159 33.893,2.159 41.513,2.159 56.753,2.159 58.658,2.159 60.563,2.159 62.468,2.159 71.993,2.159 75.803,2.159 11.986,4.064 69.136,4.064 11.033,5.969 12.938,5.969 14.843,5.969 20.558,5.969 22.463,5.969 31.988,5.969 33.893,5.969 75.803,5.969 77.708,5.969 11.986,7.874 13.891,7.874 15.796,7.874 32.941,7.874 34.846,7.874 55.801,7.874 57.706,7.874 69.136,7.874 72.946,7.874 74.851,7.874 76.756,7.874 78.661,7.874 80.566,7.874 12.938,9.779 18.653,9.779 20.558,9.779 45.323,9.779 71.993,9.779 75.803,9.779 77.708,9.779 79.613,9.779 11.986,11.684 55.801,11.684 63.421,11.684 65.326,11.684 69.136,11.684 71.041,11.684 74.851,11.684 76.756,11.684 78.661,11.684 80.566,11.684 12.938,13.589 14.843,13.589 16.748,13.589 20.558,13.589 37.703,13.589 41.513,13.589 11.986,15.494 13.891,15.494 15.796,15.494 17.701,15.494 19.606,15.494 42.466,15.494 44.371,15.494 46.276,15.494 50.086,15.494 53.896,15.494 61.516,15.494 63.421,15.494 65.326,15.494 74.851,15.494 43.418,17.399 56.753,17.399 58.658,17.399 60.563,17.399 64.373,17.399 66.278,17.399 79.613,17.399 23.479,19.05 13.891,19.304 32.941,19.304 44.371,19.304 46.276,19.304 48.181,19.304 50.086,19.304 53.896,19.304 59.611,19.304 61.516,19.304 63.421,19.304 65.326,19.304 72.946,19.304 74.851,19.304 23.174,19.355 23.784,19.355 23.479,19.66 24.368,19.837 22.59,19.863 24.063,20.142 22.285,20.168 22.895,20.168 24.368,20.447 22.59,20.472 23.454,20.726 23.149,21.031 23.758,21.031 33.893,21.209 43.418,21.209 56.753,21.209 62.468,21.209 64.373,21.209 66.278,21.209 73.898,21.209 23.454,21.336 38.656,23.114 44.371,23.114 46.276,23.114 48.181,23.114 50.086,23.114 53.896,23.114 72.946,23.114 74.851,23.114 78.661,23.114 12.938,25.019 14.843,25.019 16.748,25.019 39.608,25.019 41.513,25.019 49.133,25.019 51.038,25.019 54.848,25.019 64.373,25.019 77.708,25.019 79.613,25.019 11.986,26.924 13.891,26.924 15.796,26.924 17.701,26.924 38.656,26.924 40.561,26.924 42.466,26.924 44.371,26.924 48.181,26.924 50.086,26.924 53.896,26.924 57.706,26.924 69.136,26.924 12.938,28.829 14.843,28.829 16.748,28.829 41.513,28.829 52.943,28.829 56.753,28.829 64.373,28.829 79.613,28.829 11.986,30.734 13.891,30.734 23.416,30.734 57.706,30.734 78.661,30.734 80.566,30.734 12.938,32.639 14.843,32.639 31.988,32.639 35.798,32.639 37.703,32.639 39.608,32.639 41.513,32.639 43.418,32.639 51.038,32.639 56.753,32.639 58.658,32.639 62.468,32.639 77.708,32.639 11.986,34.544 13.891,34.544 15.796,34.544 17.701,34.544 19.606,34.544 21.511,34.544 23.416,34.544 36.751,34.544 55.801,34.544 57.706,34.544 61.516,34.544 12.938,36.449 14.843,36.449 16.748,36.449 62.468,36.449 64.373,36.449
  other v2: 9.89,9.627 9.89,10.643 9.89,11.659 9.89,12.675 9.89,13.691 9.89,14.707 9.89,15.723 9.89,16.739 9.89,17.755 9.89,18.771 9.865,19.812 24.673,20.142 23.479,20.155 10.296,20.828 12.608,20.828 13.624,20.828 14.64,20.828 15.656,20.828 16.596,20.828 19.034,20.828 20.953,22.731 9.865,23.114 10.83,23.114 11.846,23.114 12.862,23.114 13.878,23.114 14.894,23.114 15.91,23.114 16.926,23.114 17.942,23.114 18.983,23.139 20.025,23.139 9.865,24.155 24.647,24.232 25.663,24.232 26.679,24.232 27.695,24.257 28.711,24.257 29.727,24.257 30.794,24.79 9.865,25.197 31.251,25.781 9.865,26.213 31.251,26.797 9.865,27.229 31.251,27.813 9.865,28.245 31.251,28.778 9.865,29.261 19.618,29.337 20.685,29.337 21.701,29.337 22.717,29.337 23.733,29.337 30.845,29.82 24.749,30.251 9.865,30.277 25.79,30.277 26.806,30.277 27.822,30.277 28.813,30.302 29.829,30.302 9.865,31.293 9.865,32.309 9.865,33.325 9.865,34.341 9.865,35.357 9.865,36.373
IN_MIC_1: C25.2 H1.3 | length 32.6
  Top Layer w0.254: C25.2 54.23,1.397 v1(55.661,1.397)
  Bottom Layer w0.254: H1.3 25.892,4.018 28.488,1.422 v1@55.661,1.422
IN_MIC_2: C23.2 H1.1 | length 26.2
  Top Layer w0.254: C23.2 54.224,4.623 v1(55.61,4.623)
  Bottom Layer w0.254: H1.1 31.277,4.623 v1(55.61,4.623)
LED1: D6.2 U3.14 | length 11.8
  Top Layer w0.178: v1(21.574,9.652) 21.574,10.779 D6.2 ; U3.14 24.229,16.37 v1(24.47,16.129)
  Bottom Layer w0.178: v1(21.574,9.652) 23.86,9.652 24.47,10.262 v1(24.47,16.129)
LED2: D7.2 U3.15 | length 15.6
  Top Layer w0.178: D7.2 19.847,10.761 v1(19.847,9.017) ; U3.15 24.729,16.936 25.511,16.154 v1(25.511,16.129)
  Bottom Layer w0.178: v1(19.847,9.017) 24.087,9.017 25.511,10.441 v1(25.511,16.129)
LED3: D8.2 U3.16 | length 19.5
  Top Layer w0.178: D8.2 18.094,10.758 v1(18.094,8.382) ; U3.16 25.229,17.493 26.552,16.169 v1(26.552,16.129)
  Bottom Layer w0.178: v1(18.094,8.382) 24.393,8.382 26.552,10.541 v1(26.552,16.129)
LED4: D5.2 U3.5 | length 14
  Top Layer w0.178: v1(18.805,15.392) 18.805,18.644 20.067,19.905 U3.5
  Top Layer w0.254: v1(16.316,9.576) 16.32,9.579 D5.2
  Bottom Layer w0.254: v1(16.316,9.576) 18.805,12.065 v1(18.805,15.392)
MCLK: R3.1 U5.6 U6.4 | length 35.5
  Top Layer w0.254: R3.1 23.276,10.804 v1(23.276,7.645) ; U5.6 38.253,28.188 37.24,28.188 36.865,27.813 36.865,26.441 40.378,22.928 U6.4 40.355,21.835 40.355,21.326 39.425,20.396 v1(38.744,20.396)
  Bottom Layer w0.203: v1(23.276,7.645) 23.301,7.671 26.019,7.671 v1(38.744,20.396)
NetC4_1: C4.1 D4.1 U2.1
NetC14_1: C14.1 L1.1 RF3.1 RF3.2
NetC15_1: C15.1 L1.2 U3.1
NetC23_1: C23.1 C24.2 R16.2 | length 4.8
  Top Layer w0.254: C24.2 R16.2 54.16,6.087 C23.1
NetC24_1: C24.1 R12.1 | length 2.4
  Top Layer w0.254: R12.1 C24.1
NetC25_1: C25.1 C26.2 R17.2 | length 4.8
  Top Layer w0.254: C26.2 R17.2 C25.1
NetC26_1: C26.1 R14.1 | length 1.7
  Top Layer w0.254: R14.1 47.694,1.414 C26.1
NetC27_1: C27.1 R12.2 R13.1 U4.6 | length 15.9
  Top Layer w0.254: C27.1@43.178,1.903 C27.1 R13.1 ; U4.6 42.511,10.033 41.615,9.136 41.615,7.671 ; R13.1@43.313,3.815 43.275,3.815 43.003,4.087 43.003,4.124 41.615,5.513 41.615,7.671 ; R12.2 46.941,6.227 46.183,6.227 44.739,7.671 41.615,7.671
NetC27_2: C27.2 R10.1 R13.2 U4.7 | length 19.4
  Top Layer w0.254: U4.7 42.511,11.303 40.878,9.67 40.878,1.956 41.894,0.94 44.409,0.94 44.767,1.298 44.767,1.917 C27.2 44.786,2.111 R13.2 R10.1
NetC28_1: C28.1 R14.2 R15.1 U4.2 | length 20.7
  Top Layer w0.254: U4.2 38.483,11.303 39.379,10.406 39.379,5.968 37.758,4.347 R15.1 C28.1 37.783,2.515 v1(39.049,2.515) ; v1(46.415,2.921) 46.424,2.912 R14.2
  Bottom Layer w0.254: v1(39.049,2.515) 39.049,2.591 39.379,2.921 v1(46.415,2.921)
NetC28_2: C28.2 R11.1 R15.2 U4.1 | length 20.5
  Top Layer w0.254: R11.1 R15.2 36.251,2.647 C28.2 36.358,1.65 36.662,1.346 39.506,1.346 40.116,1.956 40.116,10.94 38.483,12.573 U4.1
NetC31_1: C31.1 R20.1 | length 2.4
  Top Layer w0.381: C31.1 R20.1
NetC31_2: C31.2 R19.2 | length 2.4
  Top Layer w0.381: R19.2 C31.2
NetC33_1: C33.1 R19.1 U5.14 | length 6.1
  Top Layer w0.381: U5.14 46.369,31.511 47.178,32.32 C33.1 47.255,32.293 49.614,32.293 R19.1
NetC34_2: C34.2 C35.2 U5.1 | length 5.3
  Top Layer w0.381: C34.2 C35.2 37.183,32.004 37.676,31.511 U5.1
NetC36_1: C36.1 R22.1 | length 2.4
  Top Layer w0.381: C36.1 52.081,30.318 54.44,30.318 R22.1
NetC36_2: C36.2 R21.2 | length 2.4
  Top Layer w0.381: R21.2 49.668,28.864 52.027,28.864 C36.2
NetC37_1: C37.1 R21.1 U5.13 | length 6
  Top Layer w0.381: U5.13 46.608,30.861 47.178,30.291 C37.1 47.255,30.318 49.614,30.318 R21.1
NetC38_1: C38.1 R25.1 R26.2 | length 4.7
  Top Layer w0.254: C38.1 R26.2 R25.1
NetC38_2: C38.2 U6.10 | length 4.8
  Top Layer w0.254: U6.10 41.878,18.068 44.638,20.828 C38.2
NetC41_1: C41.1 R27.1 R28.2 | length 4.7
  Top Layer w0.254: C41.1 R28.2 R27.1
NetC41_2: C41.2 U6.7 | length 5.8
  Top Layer w0.254: U6.7 40.387,17.249 40.387,16.138 v1(40.395,16.129) ; v1(43.443,16.129) 43.761,16.129 44.638,17.006 C41.2
  Bottom Layer w0.254: v1(40.395,16.129) v1(43.443,16.129)
NetC43_2: C43.2 C44.2 U6.5 | length 5.4
  Top Layer w0.254: C43.2 C44.2 39.579,21.209 39.878,21.508 U6.5
NetC45_2: C45.2 C46.2 U6.6 | length 5.2
  Top Layer w0.254: C46.2 C45.2 ; C45.2@36.879,17.653 39.833,17.653 39.878,17.608 U6.6
NetD3_2: D3.2 R1.1 | length 2
  Top Layer w0.381: R1.1 D3.2
NetD5_1: D5.1 D6.1 D7.1 D8.1 R24.2 | length 7
  Top Layer w0.254: R24.2 21.528,12.34 D6.1
NetR2_1: R2.1 U3.30 | length 3.8
  Top Layer w0.178: R2.1 21.526,25.899 21.526,25.347 22.729,24.143 U3.30
NetR3_2: R3.2 U3.8 | length 7
  Top Layer w0.178: U3.8 21.001,14.585 22.907,12.679 22.907,12.65 23.222,12.336 R3.2
NetR4_2: R4.2 U3.9 | length 7.4
  Top Layer w0.178: U3.9 21.729,14.831 23.301,13.259 24.597,13.259 24.851,13.005 R4.2
NetR5_2: R5.2 U3.10 | length 8.4
  Top Layer w0.178: U3.10 22.229,15.068 23.479,13.818 25.714,13.818 26.451,13.081 26.451,12.355 R5.2
NetR6_2: R6.2 U3.12 | length 11.9
  Top Layer w0.178: U3.12 23.229,15.515 23.86,14.884 29.753,14.884 30.801,13.837 R6.2
NetR7_2: R7.2 U3.13 | length 12.5
  Top Layer w0.178: U3.13 23.729,15.701 24.012,15.418 30.033,15.418 32.394,13.056 R7.2
NetR23_2: R23.2 U5.9 | length 3.8
  Top Layer w0.254: U5.9 45.374,28.261 46.72,26.916 46.72,26.887 46.996,26.611 R23.2
OUT_MIC_1: H2.1 R11.2 R20.2 TP9.1 | length 67.4
  Top Layer w0.254: R11.2 37.779,5.99 v1(37.779,7.264) ; R20.2 55.512,33.88 56.042,33.35 56.042,19.787 57.744,18.085 62.468,18.085 64.322,16.231 v1(64.322,12.014)
  Bottom Layer w0.254: v1(37.779,7.264) 39.434,5.61 56.241,5.61 57.95,7.319 64.339,7.319 ; v1(64.322,12.014) 64.322,11.938 64.339,11.921 TP9.1 64.339,7.319 ; H2.1 67.04,4.618 64.339,7.319
OUT_MIC_2: R10.2 R22.2 | length 36.5
  Top Layer w0.254: R10.2 43.28,6.618 v1(43.291,6.629) ; v1(54.467,27.61) R22.2
  Bottom Layer w0.254: v1(43.291,6.629) 53.39,6.629 54.917,8.157 54.917,10.146 54.917,12.354 57.49,14.926 57.49,24.587 v1(54.467,27.61)
V_REF: C18.1 C22.1 R8.2 R9.2 U4.3 U4.5 | length 22
  Top Layer w0.381: v1(36.281,10.033) U4.3 ; U4.5 43.228,8.738 44.84,8.738 45.642,7.936 C18.1 47.001,7.909 49.514,7.909 51.927,7.909 54.186,7.909 R9.2
  Bottom Layer w0.254: v1(36.281,10.033) 43.545,10.033 v1(44.866,8.712)
WS: R4.1 U5.7 U6.3 | length 33.5
  Top Layer w0.254: R4.1 24.851,9.144 v1(25.562,8.433) ; U5.7 38.976,27.611 v1(40.878,25.709) U6.3
  Bottom Layer w0.203: v1(25.562,8.433) 40.878,23.749 v1(40.878,25.709)
XIN: C6.1 C16.1 U3.29 | length 8.9
  Top Layer w0.178: U3.29 23.229,24.185 24.038,24.994 26.08,24.994 27.315,26.228 C6.1 29.621,26.328 C16.1
XOUT: C6.3 C17.1 R2.2 | length 4.7
  Top Layer w0.178: R2.2 23.236,27.419 C17.1 24.553,27.366 25.615,28.428 C6.3
pads on no net: H2.2 TP5.1 TP8.1 U3.4 U3.7 U3.19 U3.20 U3.21 U3.22 U3.23 U3.24 U3.27 U3.28

## Polygon pours and split planes (outlines as drawn)
GND on Top Layer "NONET_L-01_P-001" (solid, pour order 0): 0,3.213 0,34.765 cw(c3.081,34.765) 3.081,37.846 3,37.846 79.174,37.846 79.262,37.846 cw(c79.262,34.574) 82.534,34.574 82.534,2.983 cw(c79.551,2.983) 79.551,0 3.213,0 cw(c3.213,3.213)
GND on Bottom Layer "NONET_L-01_P-001" (solid, pour order 1): 0,3.213 0,34.765 cw(c3.081,34.765) 3.081,37.846 3,37.846 79.174,37.846 79.262,37.846 cw(c79.262,34.574) 82.534,34.574 82.534,2.983 cw(c79.551,2.983) 79.551,0 3.213,0 cw(c3.213,3.213)

## Keep-outs
Keep-Out Layer:
  circle w0.102: c3,3 r1.6
  circle w0.102: c79.534,3 r1.6
  pour cut-out: 9.331,0 3.213,0 cw(c3.213,3.213) 0,3.213 0,34.765 cw(c3.081,34.765) 3.081,37.846 9.331,37.846
  lines w0.254: 3,37.846 79.174,37.846 ; 3.081,37.846 ccw(c3.081,34.765) 0,34.765 0,3.213 ccw(c3.213,3.213) 3.213,0 79.551,0 ccw(c79.551,2.983) 82.534,2.983 82.534,34.574 ccw(c79.262,34.574) 79.262,37.846

## Other copper
Top Layer:
  region net +3.3V: 34.604,25.095 34.604,25.121 cw(c35.29,25.121) 35.29,25.806 cw(c35.29,25.121) 35.976,25.121 35.976,25.095 cw(c35.315,25.095) 35.315,24.435 35.265,24.435 cw(c35.265,25.095)
  region net GND: 23.276,20.193 23.276,20.168 cw(c22.59,20.168) 22.59,19.482 cw(c22.59,20.168) 21.904,20.168 21.904,20.193 cw(c22.565,20.193) 22.565,20.853 22.615,20.853 cw(c22.615,20.193)
  region net GND: 23.479,20.345 23.454,20.345 cw(c23.454,21.031) 22.768,21.031 cw(c23.454,21.031) 23.454,21.717 23.479,21.717 cw(c23.479,21.057) 24.139,21.057 24.139,21.006 cw(c23.479,21.006)
  region net GND: 23.682,20.117 23.682,20.142 cw(c24.368,20.142) 24.368,20.828 cw(c24.368,20.142) 25.054,20.142 25.054,20.117 cw(c24.393,20.117) 24.393,19.456 24.343,19.456 cw(c24.343,20.117)
  region net GND: 23.454,20.041 23.479,20.041 cw(c23.479,19.355) 24.165,19.355 cw(c23.479,19.355) 23.479,18.669 23.454,18.669 cw(c23.454,19.329) 22.793,19.329 22.793,19.38 cw(c23.454,19.38)
  region net +8VDC: 78.089,35.611 78.089,35.636 cw(c78.775,35.636) 78.775,36.322 cw(c78.775,35.636) 79.461,35.636 79.461,35.611 cw(c78.8,35.611) 78.8,34.95 78.749,34.95 cw(c78.749,35.611)
  region net +3.3V: 29.296,14.427 29.321,14.427 cw(c29.321,13.741) 30.007,13.741 cw(c29.321,13.741) 29.321,13.056 29.296,13.056 cw(c29.296,13.716) 28.635,13.716 28.635,13.767 cw(c29.296,13.767)
  region net +3.3V: 15.808,30.785 15.808,30.81 cw(c16.494,30.81) 16.494,31.496 cw(c16.494,30.81) 17.18,30.81 17.18,30.785 cw(c16.519,30.785) 16.519,30.124 16.469,30.124 cw(c16.469,30.785)
  region net +3.3V: 30.947,16.764 30.947,16.789 cw(c31.632,16.789) 31.632,17.475 cw(c31.632,16.789) 32.318,16.789 32.318,16.764 cw(c31.658,16.764) 31.658,16.104 31.607,16.104 cw(c31.607,16.764)
  region net +3.3V: 13.014,16.815 13.014,16.84 cw(c13.7,16.84) 13.7,17.526 cw(c13.7,16.84) 14.386,16.84 14.386,16.815 cw(c13.725,16.815) 13.725,16.154 13.675,16.154 cw(c13.675,16.815)
  region net +4.3: 43.158,34.601 43.158,34.627 cw(c43.843,34.627) 43.843,35.312 cw(c43.843,34.627) 44.529,34.627 44.529,34.601 cw(c43.869,34.601) 43.869,33.941 43.818,33.941 cw(c43.818,34.601)
  region net +4.3: 56.27,15.062 56.27,15.037 cw(c55.585,15.037) 55.585,14.351 cw(c55.585,15.037) 54.899,15.037 54.899,15.062 cw(c55.559,15.062) 55.559,15.723 55.61,15.723 cw(c55.61,15.062)
  region net +5V: 65.905,11.243 65.905,11.269 cw(c66.591,11.269) 66.591,11.954 cw(c66.591,11.269) 67.276,11.269 67.276,11.243 cw(c66.616,11.243) 66.616,10.583 66.565,10.583 cw(c66.565,11.243)
  region net +3.3V: 71.841,17.12 71.866,17.12 cw(c71.866,16.434) 72.552,16.434 cw(c71.866,16.434) 71.866,15.748 71.841,15.748 cw(c71.841,16.408) 71.18,16.408 71.18,16.459 cw(c71.841,16.459)
  region net +8VDC: 79.41,34.95 79.384,34.95 cw(c79.384,35.636) 78.699,35.636 cw(c79.384,35.636) 79.384,36.322 79.41,36.322 cw(c79.41,35.662) 80.07,35.662 80.07,35.611 cw(c79.41,35.611)
  pour cut-out: 76.934,3 ccw(c79.534,3) 79.534,0.4 ccw(c79.534,3) 82.134,3 ccw(c79.534,3) 79.534,5.6 ccw(c79.534,3)
  region net NetC14_1: 6.559,22.115 6.593,22.149 9.331,22.149 9.331,21.643 9.329,21.641 6.559,21.641
  region net NetC14_1: 6.559,20.243 9.331,20.243 9.331,20.244 9.331,19.343 6.588,19.343 6.559,19.372
  region net NetC14_1: 6.334,22.149 9.56,22.149 9.748,22.337 11.979,22.337 14.481,22.337 14.481,21.463 11.005,21.463 9.763,21.463 9.577,21.649 6.334,21.649
  region net GND: 6.334,20.244 10.119,20.244 10.119,19.349 6.334,19.349
  region net +5V: 71.436,27.47 71.436,25.781 74.812,25.781 76.557,24.036 76.557,19.678 75.595,19.678 75.595,23.43 74.354,24.67 70.136,24.67 70.136,27.47
  region net +3.3V: 78.995,22.178 78.995,17.393 80.245,16.143 80.245,13.818 76.645,13.818 76.645,16.158 73.038,16.158 71.256,14.376 69.082,14.376 69.082,17.876 73.793,17.876 77.895,17.876 77.895,22.178
  region net NetC4_1: 75.975,28.086 76.537,27.524 76.537,26.324 73.037,26.324 73.037,28.031 72.925,28.143 67.778,28.143 66.89,27.255 66.89,24.67 65.59,24.67 65.59,27.76 66.744,28.914 72.916,28.914 73.975,29.972 73.975,33.588 75.975,33.588
  region net NetC15_1: 15.08,22.337 18.018,22.352 20.177,22.352 20.676,22.045 21.001,22.045 21.001,21.765 20.677,21.765 20.177,21.473 15.08,21.473
Bottom Layer:
  region net +3.3V: 34.604,25.095 34.604,25.121 cw(c35.29,25.121) 35.29,25.806 cw(c35.29,25.121) 35.976,25.121 35.976,25.095 cw(c35.315,25.095) 35.315,24.435 35.265,24.435 cw(c35.265,25.095)
  region net GND: 23.276,20.193 23.276,20.168 cw(c22.59,20.168) 22.59,19.482 cw(c22.59,20.168) 21.904,20.168 21.904,20.193 cw(c22.565,20.193) 22.565,20.853 22.615,20.853 cw(c22.615,20.193)
  region net GND: 23.479,20.345 23.454,20.345 cw(c23.454,21.031) 22.768,21.031 cw(c23.454,21.031) 23.454,21.717 23.479,21.717 cw(c23.479,21.057) 24.139,21.057 24.139,21.006 cw(c23.479,21.006)
  region net GND: 23.682,20.117 23.682,20.142 cw(c24.368,20.142) 24.368,20.828 cw(c24.368,20.142) 25.054,20.142 25.054,20.117 cw(c24.393,20.117) 24.393,19.456 24.343,19.456 cw(c24.343,20.117)
  region net GND: 23.454,20.041 23.479,20.041 cw(c23.479,19.355) 24.165,19.355 cw(c23.479,19.355) 23.479,18.669 23.454,18.669 cw(c23.454,19.329) 22.793,19.329 22.793,19.38 cw(c23.454,19.38)
  region net +8VDC: 78.089,35.611 78.089,35.636 cw(c78.775,35.636) 78.775,36.322 cw(c78.775,35.636) 79.461,35.636 79.461,35.611 cw(c78.8,35.611) 78.8,34.95 78.749,34.95 cw(c78.749,35.611)
  region net +3.3V: 29.296,14.427 29.321,14.427 cw(c29.321,13.741) 30.007,13.741 cw(c29.321,13.741) 29.321,13.056 29.296,13.056 cw(c29.296,13.716) 28.635,13.716 28.635,13.767 cw(c29.296,13.767)
  region net +3.3V: 15.808,30.785 15.808,30.81 cw(c16.494,30.81) 16.494,31.496 cw(c16.494,30.81) 17.18,30.81 17.18,30.785 cw(c16.519,30.785) 16.519,30.124 16.469,30.124 cw(c16.469,30.785)
  region net +3.3V: 30.947,16.764 30.947,16.789 cw(c31.632,16.789) 31.632,17.475 cw(c31.632,16.789) 32.318,16.789 32.318,16.764 cw(c31.658,16.764) 31.658,16.104 31.607,16.104 cw(c31.607,16.764)
  region net +3.3V: 13.014,16.815 13.014,16.84 cw(c13.7,16.84) 13.7,17.526 cw(c13.7,16.84) 14.386,16.84 14.386,16.815 cw(c13.725,16.815) 13.725,16.154 13.675,16.154 cw(c13.675,16.815)
  region net +4.3: 43.158,34.601 43.158,34.627 cw(c43.843,34.627) 43.843,35.312 cw(c43.843,34.627) 44.529,34.627 44.529,34.601 cw(c43.869,34.601) 43.869,33.941 43.818,33.941 cw(c43.818,34.601)